# Altium PCB Weapon_System_RevA.PcbDoc
Units mil, origin at the board's own origin, x right, y up, seen from the top; angles counter-clockwise.
Board outline 2000 x 995 mil, 2 copper layers (Top Layer, Bottom Layer); 33 components, 70 nets, 115 pads, 26 vias.
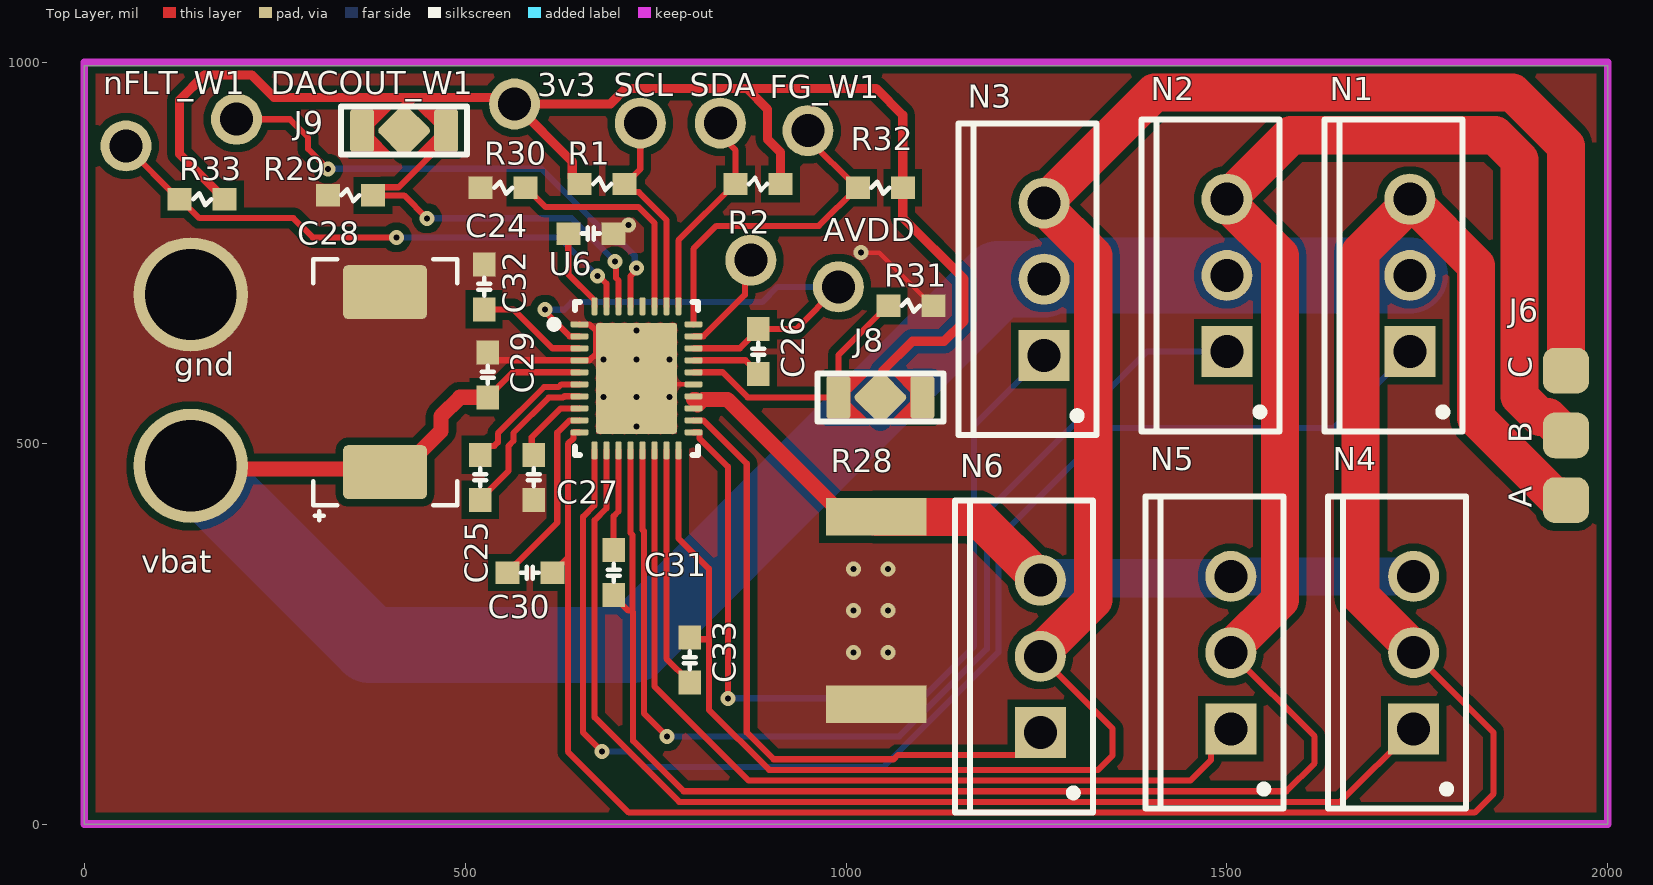
[diagram p0: Top Layer view]
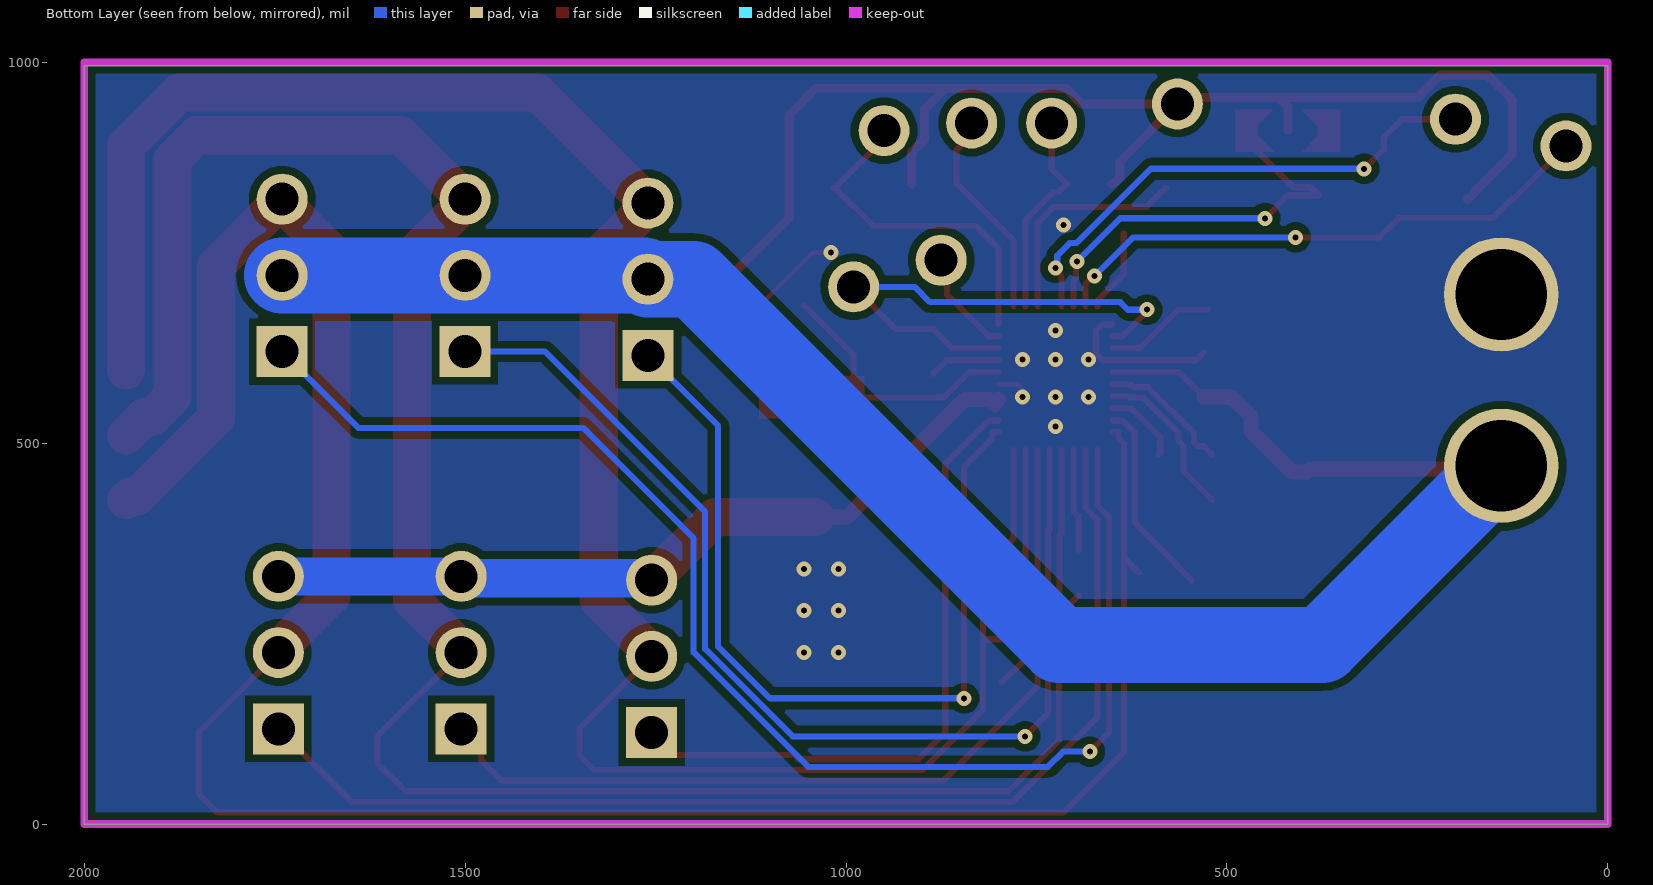
[diagram p1: Bottom Layer view, seen from below]
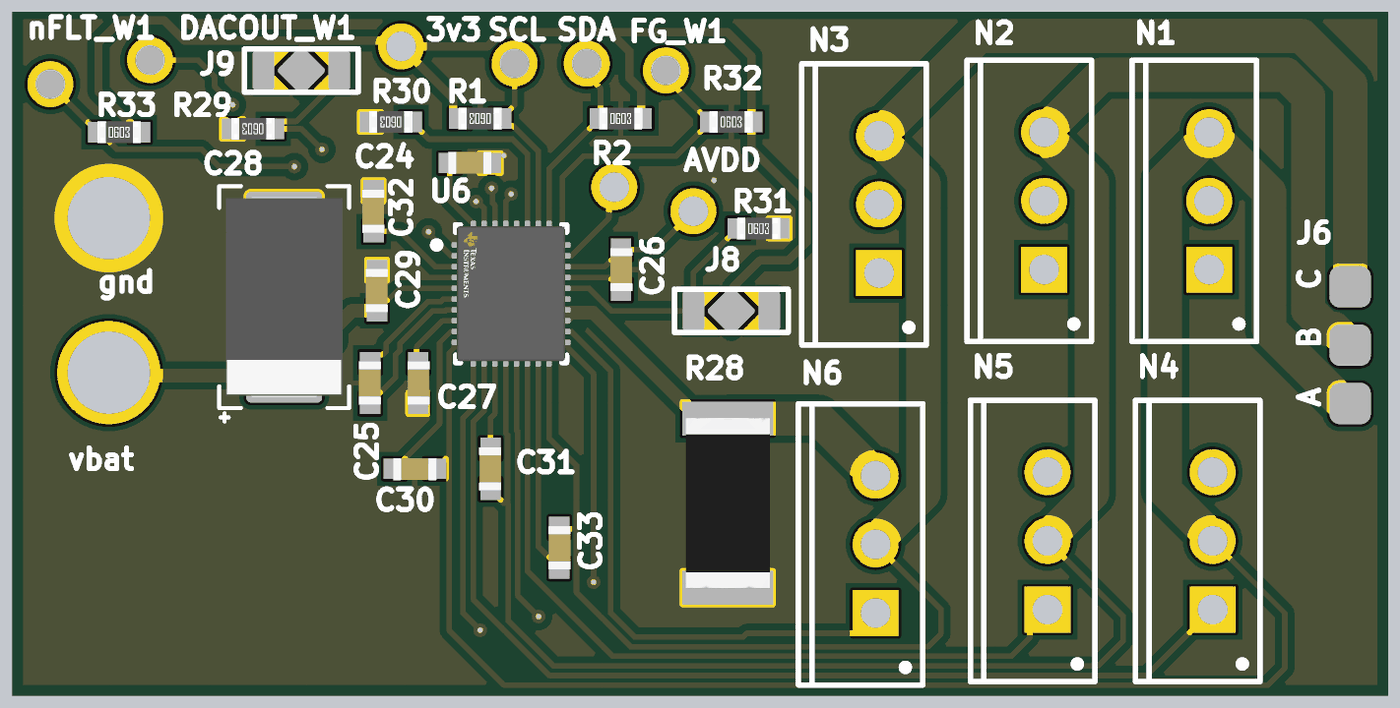
[diagram p2: 3D render of the assembled board from above, using the file's embedded part models]

## Layer stack, top to bottom
Top Solder: solder mask 0.4, Solder Resist, Dk 3.5
Top Layer: signal copper 1.4
Dielectric 1: dielectric 12.6, FR-4, Dk 4.8
Bottom Layer: signal copper 1.4
Bottom Solder: solder mask 0.4, Solder Resist, Dk 3.5

## Board outline
0,0 2000,0 2000,995 0,995

## Design rules (kind name [scope] priority, off if disabled: settings)
Clearance [All] p1: gap=10 ignorepadtopadclearanceinfootprint=FALSE except(0: Arc-Hole Track-Hole SMDPad-Hole THPad-Hole Via-Hole Fill-Hole Poly-Hole Region-Hole Text-Hole; 6: Arc-Arc Arc-Track Arc-SMDPad Arc-THPad Track-Track Track-SMDPad Track-THPad SMDPad-SMDPad SMDPad-THPad THPad-THPad)
PolygonConnect PolygonConnect_3 [All vs IsNamedPolygon('GND_L01_P001') Or IsNamedPolygon('GND_L02_P000')] p1: connectstyle=Direct reliefconductorwidth=10 reliefentries=4 polygonreliefangle="90 Angle" airgapwidth=10
PolygonConnect PolygonConnect_2 [All vs IsNamedPolygon('GND_L01_P001') Or IsNamedPolygon('GND_L02_P000')] p2: thpad.connectstyle=Direct thpad.reliefconductorwidth=10 thpad.reliefentries=4 thpad.polygonreliefangle="90 Angle" thpad.airgapwidth=10 smdpad.connectstyle=Direct smdpad.reliefconductorwidth=10 smdpad.reliefentries=4 smdpad.polygonreliefangle="90 Angle" smdpad.airgapwidth=10 via.connectstyle=Relief via.reliefconductorwidth=10 via.reliefentries=4 via.polygonreliefangle="90 Angle" via.airgapwidth=10
PolygonConnect PolygonConnect_1 [All vs IsNamedPolygon('GND_L01_P001')] p3: thpad.connectstyle=Direct thpad.reliefconductorwidth=10 thpad.reliefentries=4 thpad.polygonreliefangle="90 Angle" thpad.airgapwidth=10 smdpad.connectstyle=Direct smdpad.reliefconductorwidth=10 smdpad.reliefentries=4 smdpad.polygonreliefangle="90 Angle" smdpad.airgapwidth=10 via.connectstyle=Relief via.reliefconductorwidth=10 via.reliefentries=4 via.polygonreliefangle="90 Angle" via.airgapwidth=10
PolygonConnect [All] p4: connectstyle=Relief reliefconductorwidth=10 reliefentries=4 polygonreliefangle="90 Angle" airgapwidth=10
RoutingVias [All] p1: holewidth=28 width=50 viastyle="Through Hole" minholewidth=28 minwidth=50 maxholewidth=28 maxwidth=50
SolderMaskExpansion [All] p1: expansion=4 istentingtop=FALSE
Width [All] p1: maxlimit=100 minlimit=6 preferedwidth=10 toplayer_maxwidth=50 minimp=50.000000 maximp=50.000000 favimp=50.000000
30 further rules are at their usual default settings.

## Classes and differential pairs
component class Weapon_Motor: C24 C25 C26 C27 C28 C29 C30 C31 C32 C33 DACOUT_W1 FG_W1 J6 J8 J9 N1 N2 N3 N4 N5 N6 nFLT_W1 R28 R29 R30 R31 R32 R33 U6
component class Drive_Motors: R1 R2 SCL SDA

## Components (designator, comment, footprint, x,y, rotation, side; value= is the part's Value field where it differs from the comment)
C24 "1uF" CAP-0603 665,775 r0 top
C25 "47nF" CAP-0603 520,455 r90 top
C26 "1uF" CAP-0603 885,620 r270 top
C27 "10uF" CAP-0603 590,455 r270 top
C28 "10uF" EEF-CX1E330R-Footprint-1 395,580 r90 top
C29 "1uF" CAP-0603 530,589.53 r90 top
C30 "1uF" CAP-0603 585,330 r180 top
C31 "1uF" CAP-0603 695,330 r90 top
C32 "1uF" CAP-0603 525,705 r90 top
C33 "1uF" CAP-0603 795,215 r270 top
DACOUT_W1 "Testpoint" Testpoint 200,925 r90 top
FG_W1 "Testpoint" Testpoint 950,910 r90 top
J6 "PAD_5x5_3" PAD_5x5_3-Footprint-1 1945,510 r90 top
J8 "DPDT Solder" "DPDT Solder" 1045.12,560 r0 top
J9 "DPDT Solder" "DPDT Solder" 420,910 r180 top
N1 "CSD18536KCS" TO220 1740,720 r90 top
N2 "CSD18536KCS" TO220 1500,720 r90 top
N3 "CSD18536KCS" TO220 1260,715 r90 top
N4 "CSD18536KCS" TO220 1745,225 r90 top
N5 "CSD18536KCS" TO220 1505,225 r90 top
N6 "CSD18536KCS" TO220 1255,220 r90 top
nFLT_W1 "Testpoint" Testpoint 55,890 r90 top
R1 "5.1k" RES-0603 680,840 r180 top
R2 "5.1k" RES-0603 884.53,840 r0 top
R28 "0.025" RES-2512 1040,280 r270 top
R29 "10k" RES-0603 349.53,825 r180 top
R30 "10k" RES-0603 550,835 r180 top
R31 "10k" RES-0603 1085,680 r0 top
R32 "5.1k" RES-0603 1045,835 r0 top
R33 "5.1k" RES-0603 155,820 r0 top
SCL "Testpoint" Testpoint 730,920 r90 top
SDA "Testpoint" Testpoint 835,920 r90 top
U6 "MCF8329A1IREER" FP-REE0036A-MFG 725,585 r0 top

## Footprints (in the part's own frame and the unit in brackets; to place one, negate y for a bottom-side part, rotate by r counter-clockwise, add the part's x,y. Pads: shape width x height; smd on the part's side, far side on the other; paste and mask are expansions set on the pad)
CAP-0603 [mm]
  rect 0.8x0.75 smd: 1(-0.75,0) 2(0.75,0)
  silkscreen extent -0.3,-0.2 0.3,0.2, body extent -0.8,-0.4 0.8,0.42, height 0.81
"DPDT Solder" [mm]
  rrect20% 0.8x1.4 smd mask+0: 1(-1.4,0) 2(1.4,0)
  rrect20% 1.3x1.3 smd rot 45 mask+0: 3(0,0)
  Top Layer region: -1.75,0.7 -0.45,0.7 -1,0.15 -1,-0.175 -0.475,-0.7 -1.75,-0.7
  Top Layer region: 1.75,-0.7 0.45,-0.7 1,-0.15 1,0.175 0.475,0.7 1.75,0.7
  silkscreen extent -2.1,-0.8 2.1,0.8
EEF-CX1E330R-Footprint-1 [mm]
  rrect20% 1.8x2.8 smd: 1(-3,0) 2(3,0)
  silkscreen extent -4.6,-2.4 4.1,2.4, body extent -3.7,-2.15 3.7,2.15, height 1.85
FP-REE0036A-MFG [mm]
  rrect50% 0.6x0.2 smd paste+0 mask+0: 1(-1.9,1.8) 2(-1.9,1.4) 3(-1.9,1) 4(-1.9,0.6) 5(-1.9,0.2) 6(-1.9,-0.2) 7(-1.9,-0.6) 8(-1.9,-1) 9(-1.9,-1.4) 10(-1.9,-1.8) 19(1.9,-1.8) 20(1.9,-1.4) 21(1.9,-1) 22(1.9,-0.6) 23(1.9,-0.2) 24(1.9,0.2) 25(1.9,0.6) 26(1.9,1) 27(1.9,1.4) 28(1.9,1.8)
  rrect50% 0.2x0.6 smd paste+0 mask+0: 11(-1.4,-2.4) 12(-1,-2.4) 13(-0.6,-2.4) 14(-0.2,-2.4) 15(0.2,-2.4) 16(0.6,-2.4) 17(1,-2.4) 18(1.4,-2.4) 29(1.4,2.4) 30(1,2.4) 31(0.6,2.4) 32(0.2,2.4) 33(-0.2,2.4) 34(-0.6,2.4) 35(-1,2.4) 36(-1.4,2.4)
  rrect7% 2.7x3.7 smd paste-1000 mask+0: 37(0,0)
  silkscreen extent -2.87,-2.55 2.05,2.55, body extent -2.3,-2.8 2.3,2.8, height 0.25
PAD_5x5_3-Footprint-1 [mil]
  rrect50% 60x60 smd: A(-85,0) B(0,0) C(85,0)
RES-0603 [mm]
  rect 0.8x0.75 smd: 1(-0.75,0) 2(0.75,0)
  silkscreen extent -0.3,-0.2 0.3,0.2, body extent -0.8,-0.4 0.8,0.4, height 0.44
RES-2512 [mm]
  rect 1.25x3.35 smd: 1(3.125,0) 2(-3.125,0)
  body extent -3.15,-1.55 3.15,1.55, height 0.55
Testpoint [mm]
  round 1 smd: 1(0,0)
TO220 [mm] "TO, Thru-Hole, Vertical, Heatsink Mounted; 3 In-Line Leads; Pitch 2.54 mm"
  rect 1.7x1.7 hole 1.1: 1(-2.54,0)
  round 1.7 hole 1.1: 2(0,0) 3(2.54,0)
  silkscreen extent -5.2,-1.75 5.2,2.85, body extent -5.25,-1.8 5.25,2.9, height 19.7

## Part data
C24 C26 C27 C29 C30 C31 C32 C33: library part CMP-009-000303-1, "X5R or X7R, 16V ceramic", Design Item ID=CAP-0603, Source=ife19_Elec_Library.SchLib
C25: library part CMP-009-000303-1, "X5R or X7R, >32V ceramic", Design Item ID=CAP-0603, Source=ife19_Elec_Library.SchLib
C28: library part CMP-005-000585-1, "Aluminum Electrolytic Capacitor, 10 uF, +/- 20%, 50 V, -40 to 85 degC, 2-Pin THD, RoHS, Bulk", Manufacturer=Panasonic, Design Item ID=CMP-001-00025-5, Source="Integrated_Library - 12.03.21 - 15.39.SchLib"
DACOUT_W1 FG_W1 nFLT_W1 SCL SDA: library part CMP-009-000182-1, Design Item ID=Testpoint, Source=ife19_Elec_Library.SchLib
J6: library part CMP-057-000231-1, "3 5x5mm pads", ComponentLink1Description=http://datasheet.octopart.com/172065-0306-Molex-datasheet-101610458.pdf?src-supplier=Farnell, ComponentLink2Description=http://datasheet.octopart.com/172065-0306-Molex-datasheet-96710945.pdf?src-supplier=Farnell, ComponentLink3Description=http://datasheet.octopart.com/172065-0308-Molex-datasheet-101610459.pdf?src-supplier=Farnell, ComponentLink4Description=http://datasheet.octopart.com/172065-0308-Molex-datasheet-96710946.pdf?src-supplier=Farnell
J8 J9: library part CMP-081-000002-1, Design Item ID="DPDT Solder", Source=LTC6811.SchLib
N1 N2 N3 N4 N5 N6: library part CMP-017-000018-1, "Positive Voltage Regulator IC, 1.5 A, 5 V, 0 to 125 degC, 3-Pin TO-220, RoHS, Tube", Case/Package=TO-220, Dropout Voltage=2V, Manufacturer=STMicroelectronics, Max Input Voltage=35V, Max Ouput Current=1.5A, Max Supply Voltage=20V, Min Input Voltage=7V, Min Supply Voltage=8V, Nominal Output Voltage=5V, Package Quantity=50, Design Item ID=CMP-019-00018-2, Mounting Technology=TH, Output Current=1.5A, Output Voltage=5V, Outputs=1, Packaging=Rail/Tube, Pins=3, Source="Integrated_Library - 12.03.21 - 15.39.SchLib"
R1 R2 R29 R30 R31 R32 R33: library part CMP-014-000032-1, Design Item ID=RES-0603, Source=ife19_Elec_Library.SchLib
R28: library part CMP-055-000217-1, "RES-2512", Design Item ID=RES-2512, Source=ife19_Elec_Library.SchLib
U6: library part CMP-00370-145502424-1, "MCF8329A1IREER 60-V, sensorless, field-oriented control (FOC) three-phase BLDC gate driver 36-WQFN -40 to 125", Ambient Temperature Range High=125°C, Manufacturer Lifecycle Status=ACTIVE, Max Junction Temperature (Tj)=150°C, Max Supply Voltage=60V, Min Operating Temperature=-40°C, Min Supply Voltage=4.5V, Output Current=2A, Height=800µm, Length=4mm, Lifecycle Status=Production, Max Operating Temperature=125°C, NexarPartId=145502424, Number of Outputs=3, Number of Pins=36, Thickness=750µm, Width=5mm

## Free pads (board coordinates)
  round 150 hole 120: 10(140,470) 10(140,695)
  round 66.93 hole 43.31: 14(55,890) 14(200,925) 14(565,945) 14(730,920) 14(835,920) 14(875,740) 14(950,910) 14(990,705)

## Via types
v1: diameter 19.68, hole 7.87, Top Layer to Bottom Layer, 26 vias

## Nets (pads, with @x,y where several pads share a name; then routed paths per layer and width w, separated by ;. In a path a pad name is that pad's centre, name@x,y a point inside that pad or via, vN(x,y) a via of type N, cw(c..) or ccw(c..) an arc to the next point about the centre after c; other vN are vias at no path point)
+3V3: J8.3 J9.3 pad.14@565,945 R1.2 R2.2 R32.2 R33.2 | length 1964.1
  Top Layer w12: R33.2 183.54,820 174.78,828.76 174.78,829.75 125,879.53 125,950 158,983 220,983 249.44,953.56 432.07,953.56 ; J9.3 420,941.49 432.07,953.56 ; R1.2 649.49,840 640.72,848.76 640.72,869.28 pad.14@565,945 ; R2.2 914.06,881.65 897.03,898.68 897.03,937.97 869.54,965.46 ; J8.3 1045.12,587.71 1047.82,590.41 1047.82,594.19 1087.22,633.59 1128.59,633.59 1155,660 1155,715.38 1074.53,795.85 R32.2 1074.53,930.47 1039.54,965.46 869.54,965.46 ; 432.07,953.56 556.44,953.56 pad.14@565,945 ; pad.14@565,945 690.7,945 711.17,965.46 869.54,965.46
A_GND_L: 
A_GND_R: 
A_GND_W: C26.2 U6.25 | length 93.3
  Top Layer w8: U6.25 867.83,608.62 885,591.46 C26.2
A_VDD: C26.1 pad.14@990,705 U6.2 U6.26 | length 682.8
  Top Layer w8: v1(605,675) 605,672.33 637.14,640.18 650.13,640.18 U6.2 ; U6.26 860.83,624.37 885,648.54 C26.1 934.53,649.53 pad.14@990,705
  Bottom Layer w8: v1(605,675) 630,675 640,685 890,685 910,705 pad.14@990,705
GHA: N1.1 U6.11 | length 1793.8
  Top Layer w8: U6.11 669.88,418.42 655,403.54 655,120 v1(680,95)
  Bottom Layer w8: v1(680,95) 715,95 735,75 1049.8,75 1200,225.2 1200,375 1345,520 1640,520 N1.1
GHB: N2.1 U6.15 | length 1438.4
  Top Layer w8: U6.15 732.87,386.11 734.62,384.36 734.62,145.38 v1(765,115)
  Bottom Layer w8: v1(765,115) 1070,115 1185,230 1185,410 1395,620 N2.1
GHC: N3.1 U6.19 | length 1143.7
  Top Layer w8: U6.19 807.55,514.13 807.61,514.07 807.61,506.32 845,468.94 v1(845,165)
  Bottom Layer w8: v1(845,165) 1100,165 1167.77,232.77 1167.77,522.77 N3.1
GLA: N4.1 U6.12 | length 1517.7
  Top Layer w8: U6.12 685.63,414.37 670,398.74 670,140 781,29 1649,29 N4.1
GLB: N5.1 U6.16 | length 1154.3
  Top Layer w8: U6.16 748.62,180.8 872.42,57 1452,57 1479.22,84.22 1479.22,99.22 N5.1
GLC: N6.1 U6.20 | length 860.6
  Top Layer w8: U6.20 799.87,529.82 812.86,529.82 869.69,472.99 869.69,120.31 905,85 1062.5,85 1068.04,90.54 1225.54,90.54 N6.1
GND: C24.2 C27.2 C28.2 C29.2 C32.2 pad.10@140,695 R28.1 R29.2 R30.2 R31.2 U6.1 U6.4 U6.23 U6.37 | length 372.8
  Top Layer w6: v1(768.31,560.39) 768.31,570.34 775.09,577.13 U6.23 ; v1(1020,750) 1043.54,750 1113.54,680 R31.2
  Top Layer w8: C29.2 540.43,608.62 U6.4 650.26,608.68 663.25,608.68 672.01,617.44 672.01,647.04 663.25,655.8 650.26,655.8 U6.1
  other v1: 1010,225 1055,225 1010,280 1055,280 1010,335 1055,335 725,522.01 681.69,560.39 725,560.39 681.69,609.61 725,609.61 768.31,609.61 725,647.99 714.36,786.16
LSS: N4.3 N5.3 N6.3 R28.2 U6.21 U6.22 | length 1054.4
  Top Layer w20: 799.8,557.19 802.81,557.19 805,555 805,550 812.19,557.19 844.5,557.19 998.66,403.03 R28.2
  Top Layer w50: R28.2 1171.97,403.03 N6.3
  Bottom Layer w50: N6.3 1257.5,322.5 1502.5,322.5 N5.3 N4.3
NetAVDD_L_1: 
NetAVDD_R_1: 
NetC10_1: 
NetC11_1: 
NetC18_1: 
NetC19_1: 
NetC20_1: 
NetC20_2: 
NetC21_1: 
NetC21_2: 
NetC22_1: 
NetC23_1: 
NetC24_1: C24.1 U6.36 | length 109.8
  Top Layer w8: C24.1 635.47,721.65 669.88,687.24 U6.36
NetC25_1: C25.1 U6.7 | length 212.5
  Top Layer w8: C25.1 520,426.46 557.12,463.58 557.12,496.3 563.59,502.77 563.59,513.39 609.77,559.57 628.69,559.57 630.5,561.38 U6.7
NetC25_2: C25.2 U6.6 | length 176
  Top Layer w8: C25.2 520,485.51 530.76,496.28 538.44,496.28 543.12,500.96 543.12,512.72 603.97,573.57 622.89,573.57 626.39,577.06 650.13,577.06 U6.6
NetC27_1: C27.1 U6.8 | length 102.4
  Top Layer w8: C27.1 587.59,486.94 587.59,507.59 625.57,545.57 650.13,545.57 U6.8
NetC30_2: C30.2 U6.9 | length 260.8
  Top Layer w8: C30.2@546.22,319.76 567.22,340.76 567.22,341.75 621,395.53 621,513.67 637.14,529.82 650.13,529.82 U6.9
NetC31_2: C31.2 U6.13 | length 133.6
  Top Layer w8: C31.2 695,403.94 701.38,410.32 U6.13
NetC32_1: C32.1 U6.3 | length 146.4
  Top Layer w8: C32.1 563.56,675.47 614.66,624.37 U6.3
NetC33_2: C33.2 U6.17 | length 317.7
  Top Layer w8: U6.17 764.37,217.09 795,186.46 C33.2
NetDACOUT_W1_1: DACOUT_W1.1 pad.14@200,925 U6.33 | length 676.4
  Top Layer w8: DACOUT_W1.1 270,925 293.88,901.12 293.88,886.12 v1(320,860) ; U6.33 717.13,718.96 725,726.84 v1(725,730)
  Bottom Layer w8: v1(320,860) 600,860 697.68,762.32 706.42,762.32 722.76,745.97 722.76,732.24 v1(725,730)
NetFG_L1_1: 
NetFG_R1_1: 
NetFG_W1_1: FG_W1.1 pad.14@950,910 R32.1 U6.28 | length 449.5
  Top Layer w8: U6.28 799.8,754.8 830,785 964.49,785 R32.1@1014.49,835 ; FG_W1.1 950,899.49 R32.1@1014.49,835 ; R32.1 R32.1@1014.49,835
NetJ1_1: 
NetJ2_1: 
NetJ3_1: 
NetJ4_A: 
NetJ4_B: 
NetJ4_C: 
NetJ5_A: 
NetJ5_B: 
NetJ5_C: 
NetJ7_1: 
NetJ8_1: J8.1 R31.1 U6.24 | length 351.5
  Top Layer w8: U6.24 837.94,592.87 870.82,560 J8.1 990,615.51 1054.49,680 R31.1
NetJ9_1: J9.1 R29.1 U6.34 | length 552.5
  Top Layer w8: v1(450,795) 420,825 R29.1 389.82,835.76 412.69,835.76 475.12,898.19 J9.1 ; v1(696.55,738.47) 698.18,736.84 698.18,716.62 701.38,713.42 U6.34
  Bottom Layer w8: v1(450,795) 640.01,795 v1(696.55,738.47)
NetnFLT_L1_1: 
NetnFLT_R1_1: 
NetnFLT_W1_1: nFLT_W1.1 pad.14@55,890 R33.1 U6.35 | length 735.6
  Top Layer w8: nFLT_W1.1 55,889.49 124.49,820 126.46,820 151.22,795.24 274.76,795.24 300,770 v1(410,770) ; v1(674.01,719.15) 675.85,719.15 685.63,709.37 U6.35
  Bottom Layer w8: v1(410,770) 623.16,770 v1(674.01,719.15)
NetPWM1_1: 
NetPWM2_1: 
NetR1_1: pad.14@730,920 R1.1 SCL.1 U6.30 | length 275.8
  Top Layer w8: R1.1 R1.1@710.51,840 ; SCL.1 730,859.49 R1.1@710.51,840 ; U6.30 764.37,792.87 728,829.24 721.28,829.24 R1.1@710.51,840
NetR2_1: pad.14@835,920 R2.1 SDA.1 U6.29 | length 280.4
  Top Layer w8: U6.29 780.12,766.1 854.02,840 R2.1 855,884.05 835,904.05 SDA.1
NetR16_1: 
NetR17_1: 
NetR22_1: 
NetR23_1: 
NetR30_1: R30.1 U6.31 | length 297.7
  Top Layer w8: R30.1 580.51,835 605.51,810 727.44,810 748.84,788.59 748.84,713.7 748.62,713.48 U6.31
NetSOX_L1_1: 
NetSOX_R1_1: 
NetU4_32: 
NetU5_32: 
NetU6_27: pad.14@875,740 U6.27 | length 138.6
  Top Layer w8: U6.27 799.87,640.18 812.86,640.18 867.21,694.54 867.21,732.21 pad.14@875,740
OUT_WA: C30.1 J6.A N1.3 N4.2 U6.10 | length 3081.8
  Top Layer w8: C30.1 615.51,330 635,349.49 ; U6.10 642.45,514.13 642.39,514.07 642.39,506.32 635,498.94 635,349.49 ; N4.2 1850,120 1850,40 1825,15 715,15 635,95 635,349.49
  Top Layer w50: N4.2 1745,229.58 1675.54,299.05 1675.54,750.95 1740,815.42 N1.3 1827.09,732.91 1827.09,532.85 1929.95,430 1940,430 J6.A
OUT_WB: C31.1 J6.B N2.3 N5.2 U6.14 | length 3019.7
  Top Layer w8: C31.1 695,299.49 714.49,280 718.87,280 ; U6.14 717.13,382.06 719.76,379.42 719.76,280.89 718.87,280 ; N5.2 1615,115 1615,80 1578,43 786.8,43 720.62,109.18 720.62,278.25 718.87,280
  Top Layer w50: N5.2 1505,229.58 1569.46,294.05 1569.46,745.95 1500,815.42 N2.3 1584,904 1851.8,904 1884,871.8 1884,560.95 1910.95,534 1921,534 J6.B
OUT_WC: C33.1 J6.C N3.3 N6.2 U6.18 | length 2842.3
  Top Layer w8: U6.18 780.12,374.88 820,335 820,242.5 ; C33.1 797.03,242.5 820,242.5 ; N6.2 1350,125 1350,90 1331,71 899,71 820,150 820,242.5
  Top Layer w50: N6.2 1255,224.58 1324.46,294.05 1324.46,745.95 1260,810.42 N3.3 1405,960 1875,960 1945,890 J6.C
Vbat: C28.1 C29.1 N1.2 N2.2 N3.2 pad.10@140,470 U6.5 | length 2478.2
  Top Layer w8: C29.1 530,560.98 540.76,571.75 541.75,571.75 562.87,592.87 U6.5
  Top Layer w20: pad.10@140,470 144.06,465.94 390.94,465.94 C28.1 414.69,461.89 468.4,515.61 468.4,535.29 493.11,560 C29.1
  Bottom Layer w100: pad.10@140,470 375,235 720,235 1200,715 N3.2 1265,720 N2.2 N1.2
pads on no net: J8.2 J9.2 U6.32

## Polygon pours and split planes (outlines as drawn)
GND on Bottom Layer "GND_L02_P000" (solid, pour order 0): 1990,10 15,10 15,985 10,990 1990,990
GND on Top Layer "GND_L01_P001" (solid, pour order 1): 1990,10 15,10 15,985 10,990 1990,990

## Keep-outs
Keep-Out Layer:
  lines w10: 0,0 0,1000 2000,1000 2000,0 0,0

## Silkscreen, mask and mechanical layers (free items; w line width, h text height)
Top Overlay:
  text "3v3" at 595,955 h30
  text "AVDD" at 970,765 h30
  text "gnd" at 118.29,588.06 h30
  text "vbat" at 75,330 h30

## Text inside footprints (layer, text, board x,y; h text height)
J6: Top Overlay "C" at 1900,585 h30 r90; Top Overlay "B" at 1900,500 h30 r90; Top Overlay "A" at 1900,415 h30 r90